# Altium PCB PCB1.PcbDoc
Units mm, origin at the board's own origin, x right, y up, seen from the top; angles counter-clockwise.
Board outline 40 x 20 mm, 2 copper layers (Top Layer, Bottom Layer), stack 1.571 mm thick; 5 components, 3 nets, 14 pads, 209 vias.
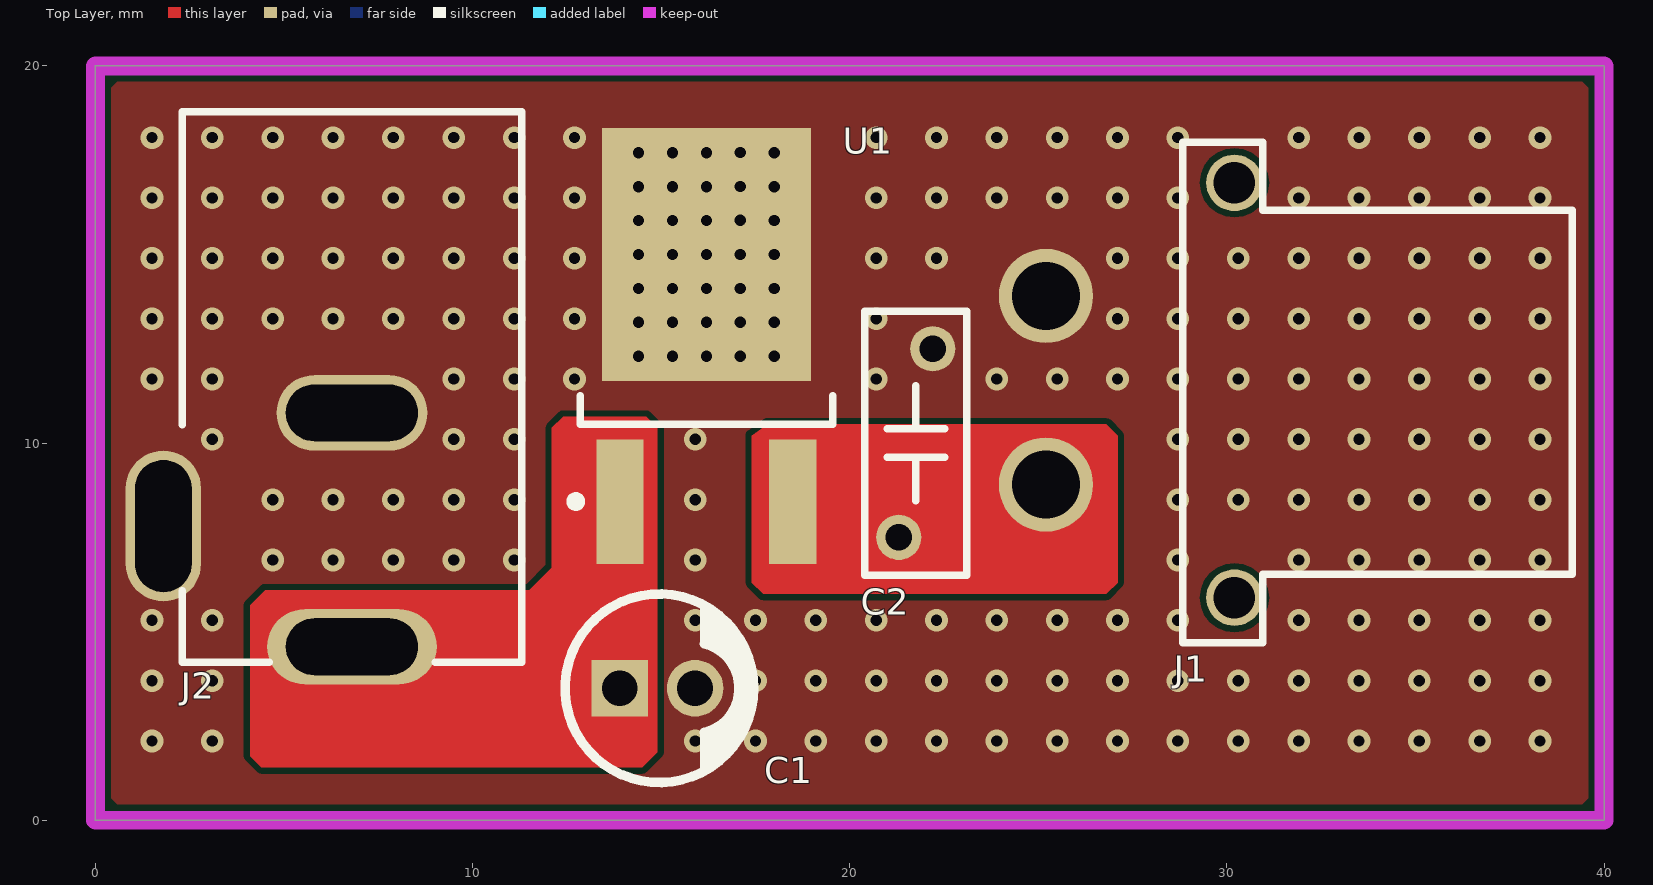
[diagram p0: Top Layer view]
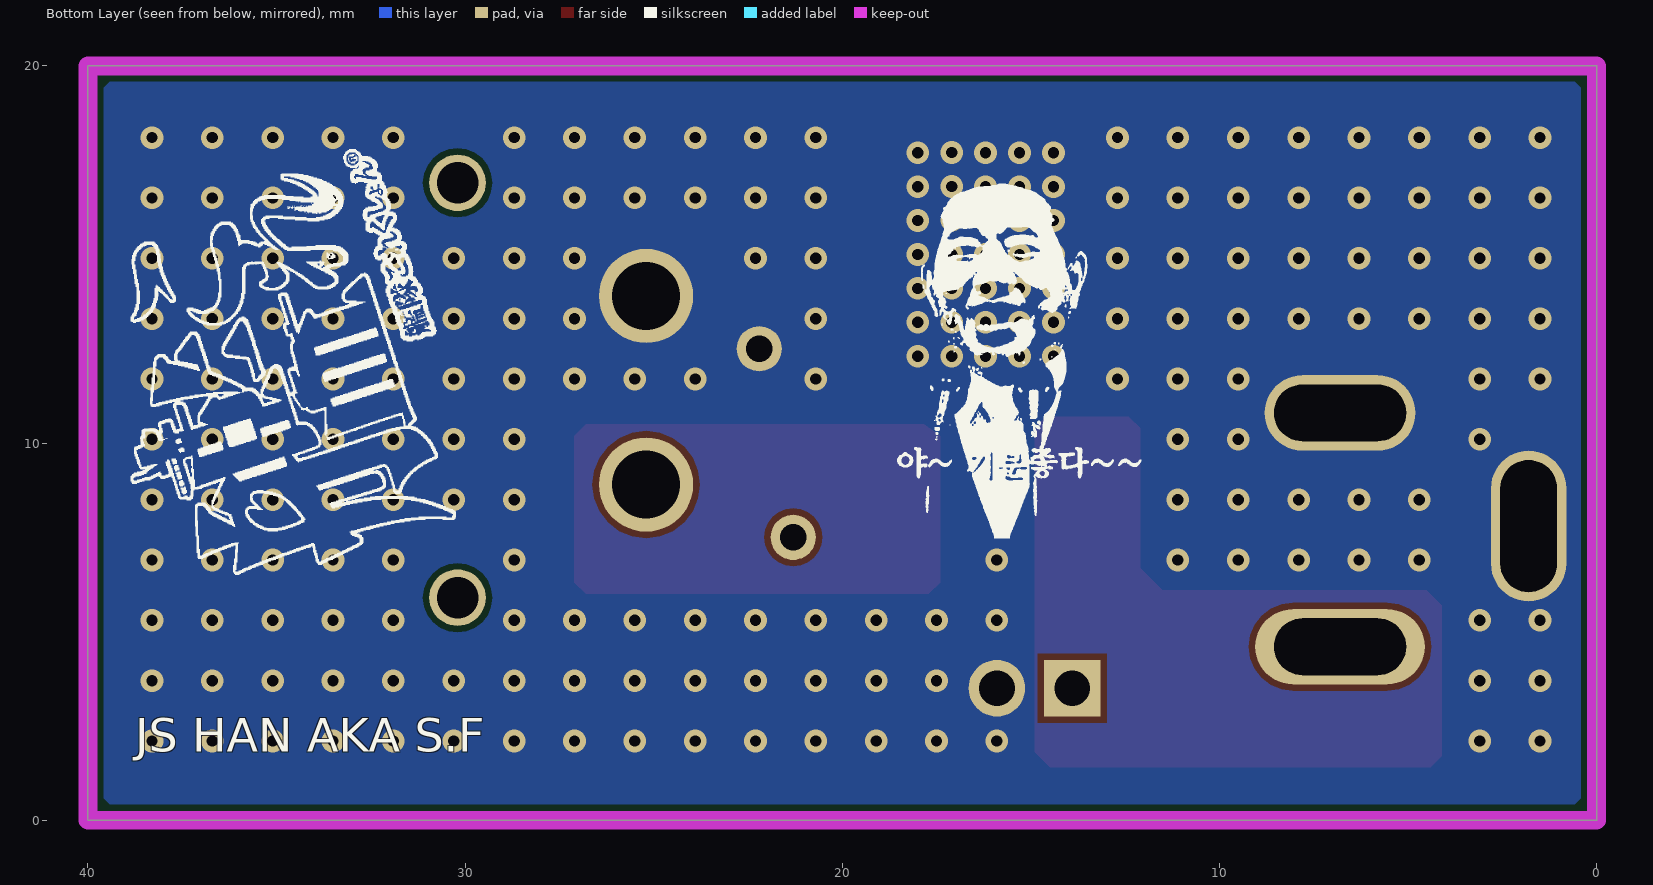
[diagram p1: Bottom Layer view, seen from below]
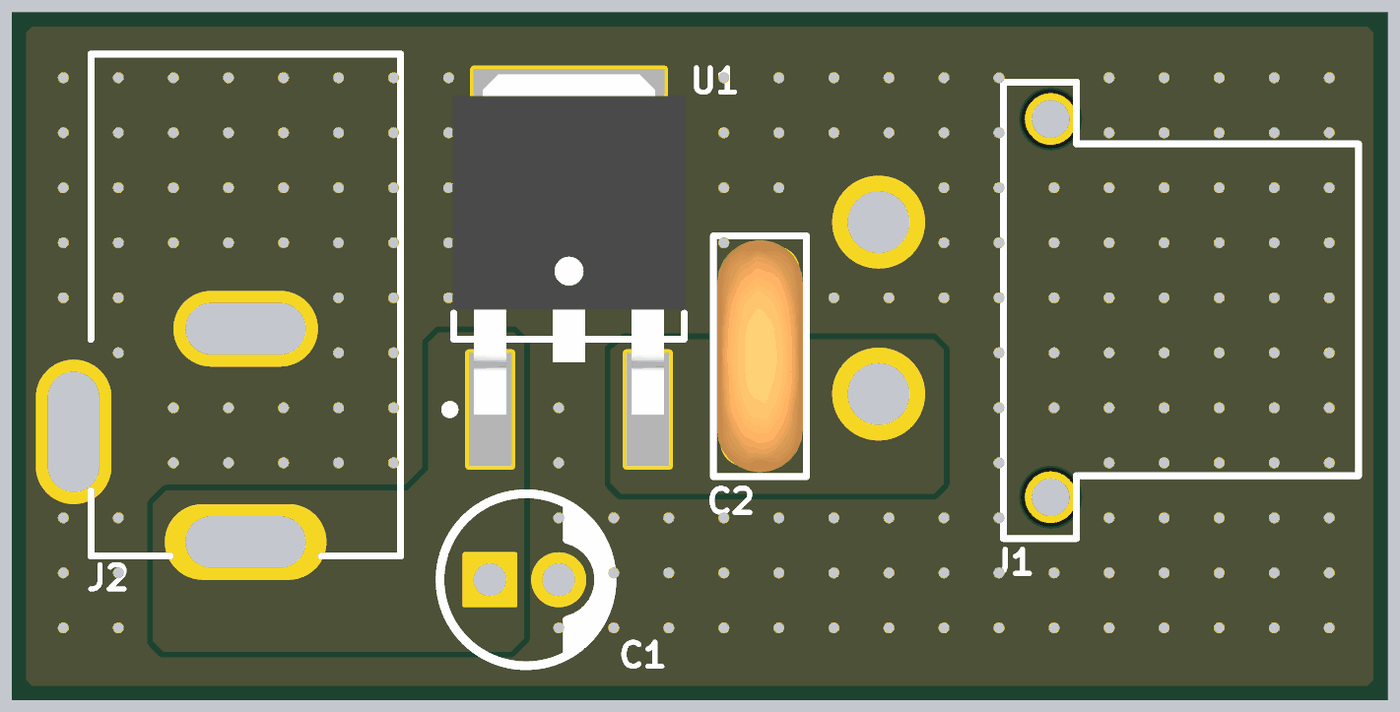
[diagram p2: 3D render of the assembled board from above, using the file's embedded part models]

## Layer stack, top to bottom
Top Solder: solder mask 0.0102, Solder Resist, Dk 3.5
Top Layer: signal copper 0.0356
Dielectric 1: core 1.5, FR-4, Dk 4.8
Bottom Layer: signal copper 0.0356
Bottom Solder: solder mask 0.0102, Solder Resist, Dk 3.5

## Board outline
0,0 0,20 40,20 40,0

## Design rules (kind name [scope] priority, off if disabled: settings)
Clearance [All] p1: gap=0.16 ignorepadtopadclearanceinfootprint=FALSE except(0: Arc-Hole Track-Hole SMDPad-Hole THPad-Hole Via-Hole Fill-Hole Poly-Hole Region-Hole Text-Hole)
PolygonConnect [All] p1: connectstyle=Direct reliefconductorwidth=0.254 reliefentries=4 polygonreliefangle="90 Angle" airgapwidth=0.254
RoomDefinition 7805 [InComponentClass('7805')] p1: confinementstyle=ConfineIn formatcopy=TRUE lockcomponents=FALSE outline 0.483,0.7 39.559,0.7 39.559,19.134 0.483,19.134
RoutingVias [All] p1: holewidth=0.3 width=0.6 viastyle="Through Hole" minholewidth=0.3 minwidth=0.6 maxholewidth=0.3 maxwidth=0.6
SolderMaskExpansion SolderMaskVIA [IsVia] p1: expansion=0.102 istentingtop=TRUE
SolderMaskExpansion [All] p2: expansion=0.102 istentingtop=FALSE
UnRoutedNet [All] p1: checkbadconnections=TRUE
ViasUnderSMD [All] p1: allowed=TRUE
Width [All] p1: maxlimit=5.23 minlimit=0.16 preferedwidth=0.2 minimp=50.000000 maximp=50.000000 favimp=50.000000
29 further rules are at their usual default settings.

## Components (designator, comment, footprint, x,y, rotation, side; value= is the part's Value field where it differs from the comment)
C1 "Generic THT Electrolytic capacitor" "THT Electrolythic 5x11x2mm" 14.9,3.5 r0 top value=0.33uF
C2 "Generic THT Ceramic" "Generic THT Ceramic -Footprint-2" 21.75,10 r270 top value=100nF
J1 "XT30PW-F" "XT30 Female PCB Mount-Footprint-1" 27.7,11.4 r0 top
J2 "DC-005" DC-0005-Footprint-1 6.8,18.789 r270 top
U1 "MC7805BDTG" DPAK229P991X238-3M 16.2,12.6 r90 top

## Footprints (in the part's own frame and the unit in brackets; to place one, negate y for a bottom-side part, rotate by r counter-clockwise, add the part's x,y. Pads: shape width x height; smd on the part's side, far side on the other; paste and mask are expansions set on the pad)
DC-0005-Footprint-1 [mm]
  oval 2x4.5 hole 3.5 slot 1.5 at 0 deg unplated: 1(14.189,0)
  oval 2x4 hole 3.5 slot 1.5 at 0 deg: 2(7.989,0)
  oval 4x2 hole 1.5 slot 3.5 at 0 deg: 3(10.989,-5)
  silkscreen extent 0,-4.5 14.6,4.5, body extent 0,-5.02 14.5,4.78, height 11
DPAK229P991X238-3M [mm] "D-PAK, 3-Pads, Body 6.21x6.73mm (max), IPC Low Density"
  rect 3.3x1.25 smd: 1(-4.15,2.29) 2(-4.15,-2.29)
  rect 6.7x5.55 smd: 3(2.4,0)
  silkscreen extent -4.27,-3.35 -1.35,3.59, body extent -4.3,-3.37 5.6,3.37, height 2.38
"Generic THT Ceramic -Footprint-2" [mm]
  round 1.2 hole 0.7: 1(-2.5,0.45) 2(2.5,-0.45)
  silkscreen extent -3.5,-1.35 3.5,1.35, body extent -3.37,-1.25 3.38,1.25, height 8
"THT Electrolythic 5x11x2mm" [mm] "THT Electrolythic 5x11x2mm"
  rect 1.5x1.5 hole 0.95 mask+0.051: 1(-1,0)
  round 1.5 hole 0.95 mask+0.051: 2(1,0)
  silkscreen extent -2.45,-2.5 2.55,2.5, body extent -2.53,-2.53 2.53,2.53, height 11.29
"XT30 Female PCB Mount-Footprint-1" [mm]
  round 2.5 hole 1.8: 1(-2.5,-2.5) 2(-2.5,2.5)
  round 1.5 hole 1.1: SH1(2.5,5.5) SH2(2.5,-5.5)
  silkscreen extent 1.12,-6.7 11.45,6.57, body extent -3.5,-6.7 11.4,6.6, height 5.01

## Part data
C1: library part CMP-0001-00007-3, Capacitor Type=Electrolythic, Case/Package=Various, Mount=THT, Pins=2, RoHS=Yes
C2: library part CMP-0001-00008-1, "Generic Thruhole Ceramic Disc Capacitor", Capacitor Type=Ceramic, Case/Package=Thruhole, Mount=THT, RoHS=Yes
J1: library part CMP-003-0034-4, "XT30 BAT Connector Female PCB Mount"
J2: library part CMP-003-0019-1, "DC Adapter Jack 2.0mm"
U1: library part CMP-ROOT-0006-2, "ON SEMICONDUCTOR         MC7805BDTG            Linear Voltage Regulator, Fixed, Positive Voltage, 10V To 35V In, 5V And 1A Out, TO-252-3", Case/Package=DPAK, Current Rating=1A, Dropout Voltage=2V, Max Input Voltage=35V, Max Operating Temperature=125°C, Min Input Voltage=7V, Min Operating Temperature=-40°C, Min Output Voltage=5V, Output Voltage Accuracy=4%, Package Quantity=75, Power Supply Rejection Ratio (PSRR)=68dB, Quiescent Current=8mA, Accuracy=4%, Contact Plating="Tin, Matte", Halogen Free="Halogen Free", Height=2.38mm, Lead Free="Lead Free", Length=6.73mm, Max Output Current=1A, Mount="Surface Mount", Nominal Output Voltage=5V, Number of Outputs=1, Number of Pins=3, Number of Regulators=1, Operating Supply Voltage=35V, Output Current=1A, Output Voltage=5V, Packaging=Rail/Tube, Polarity=Positive, Radiation Hardening=No, REACH SVHC="No SVHC", Width=6.22mm

## Via types
v1: diameter 0.6, hole 0.3, Top Layer to Bottom Layer, tented both sides, 208 vias
v2: diameter 0.6, hole 0.3, Top Layer to Bottom Layer, 1 vias

## Nets (pads, with @x,y where several pads share a name; then routed paths per layer and width w, separated by ;. In a path a pad name is that pad's centre, name@x,y a point inside that pad or via, vN(x,y) a via of type N, cw(c..) or ccw(c..) an arc to the next point about the centre after c; other vN are vias at no path point)
GND: C1.2 C2.1 J1.2 J2.2 J2.3 U1.3
  other v1: 1.5,2.1 3.1,2.1 15.9,2.1 17.5,2.1 19.1,2.1 20.7,2.1 22.3,2.1 23.9,2.1 25.5,2.1 27.1,2.1 28.7,2.1 30.3,2.1 31.9,2.1 33.5,2.1 35.1,2.1 36.7,2.1 38.3,2.1 1.5,3.7 3.1,3.7 17.5,3.7 19.1,3.7 20.7,3.7 22.3,3.7 23.9,3.7 25.5,3.7 27.1,3.7 28.7,3.7 30.3,3.7 31.9,3.7 33.5,3.7 35.1,3.7 36.7,3.7 38.3,3.7 1.5,5.3 3.1,5.3 15.9,5.3 17.5,5.3 19.1,5.3 20.7,5.3 22.3,5.3 23.9,5.3 25.5,5.3 27.1,5.3 28.7,5.3 31.9,5.3 33.5,5.3 35.1,5.3 36.7,5.3 38.3,5.3 4.7,6.9 6.3,6.9 7.9,6.9 9.5,6.9 11.1,6.9 15.9,6.9 28.7,6.9 31.9,6.9 33.5,6.9 35.1,6.9 36.7,6.9 38.3,6.9 4.7,8.5 6.3,8.5 7.9,8.5 9.5,8.5 11.1,8.5 15.9,8.5 28.7,8.5 30.3,8.5 31.9,8.5 33.5,8.5 35.1,8.5 36.7,8.5 38.3,8.5 3.1,10.1 9.5,10.1 11.1,10.1 15.9,10.1 28.7,10.1 30.3,10.1 31.9,10.1 33.5,10.1 35.1,10.1 36.7,10.1 38.3,10.1 1.5,11.7 3.1,11.7 9.5,11.7 11.1,11.7 12.7,11.7 20.7,11.7 23.9,11.7 25.5,11.7 27.1,11.7 28.7,11.7 30.3,11.7 31.9,11.7 33.5,11.7 35.1,11.7 36.7,11.7 38.3,11.7 14.4,12.3 15.3,12.3 16.2,12.3 17.1,12.3 18,12.3 14.4,13.2 15.3,13.2 16.2,13.2 17.1,13.2 18,13.2 1.5,13.3 3.1,13.3 4.7,13.3 6.3,13.3 7.9,13.3 9.5,13.3 11.1,13.3 12.7,13.3 20.7,13.3 27.1,13.3 28.7,13.3 30.3,13.3 31.9,13.3 33.5,13.3 35.1,13.3 36.7,13.3 38.3,13.3 14.4,14.1 15.3,14.1 16.2,14.1 17.1,14.1 18,14.1 1.5,14.9 3.1,14.9 4.7,14.9 6.3,14.9 7.9,14.9 9.5,14.9 11.1,14.9 12.7,14.9 20.7,14.9 22.3,14.9 27.1,14.9 30.3,14.9 31.9,14.9 33.5,14.9 35.1,14.9 36.7,14.9 38.3,14.9 14.4,15 15.3,15 16.2,15 17.1,15 18,15 14.4,15.9 15.3,15.9 16.2,15.9 17.096,15.904 18,15.9 1.5,16.5 3.1,16.5 4.7,16.5 6.3,16.5 7.9,16.5 9.5,16.5 11.1,16.5 12.7,16.5 20.7,16.5 22.3,16.5 23.9,16.5 25.5,16.5 27.1,16.5 28.7,16.5 31.9,16.5 33.5,16.5 35.1,16.5 36.7,16.5 38.3,16.5 14.4,16.8 15.3,16.8 16.2,16.8 17.096,16.804 18,16.8 14.4,17.7 15.3,17.7 16.2,17.7 17.096,17.704 18,17.7 1.5,18.1 3.1,18.1 4.7,18.1 6.3,18.1 7.9,18.1 9.5,18.1 11.1,18.1 12.7,18.1 20.7,18.1 22.3,18.1 23.9,18.1 25.5,18.1 27.1,18.1 28.7,18.1 31.9,18.1 33.5,18.1 35.1,18.1 36.7,18.1 38.3,18.1
  other v2: 28.7,14.9
NetC1_1: C1.1 J2.1 U1.1
NetC2_2: C2.2 J1.1 U1.2
pads on no net: J1.SH1 J1.SH2

## Polygon pours and split planes (outlines as drawn)
GND on Top Layer "GND_RHO" (solid, pour order 0): 0,0 0,20 40,20 40,0
GND on Bottom Layer "MotherFucker" (solid, pour order 1): 0,0 0,20 40,20 40,0

## Keep-outs
Keep-Out Layer:
  the board outline again, w0.5

## Other copper
Top Layer:
  region net NetC2_2: 17.82,10.5 17.4,10.2 17.4,6.3 17.7,6 26.8,6 27.1,6.3 27.1,10.2 26.8,10.5
  region net NetC1_1: 12.4,10.7 12.1,10.4 12.1,6.7 11.5,6.1 4.5,6.1 4.1,5.7 4.1,1.7 4.4,1.4 14.5,1.4 14.9,1.8 14.9,10.4 14.6,10.7
Multi-Layer:
  pour cut-out: 40,20 39,20 40,19
  pour cut-out: 40,0 40,1 39,0
  pour cut-out: 0,0 1,0 0,1
  pour cut-out: 0,20 0,19 1,20

## Silkscreen, mask and mechanical layers (free items; w line width, h text height)
Bottom Overlay:
  drawing of 89 lines, arcs and shapes, not listed
  text "JS HAN AKA S.F" at 38.75,1.527 h1.52
Mechanical 1:
  the board outline again, w0.254